# Altium PCB Mega2560PCB2.PcbDoc (part 2 of 2)
Units mil, origin at the board's own origin, x right, y up, seen from the top; angles counter-clockwise.
Board outline 3543.31 x 2165.35 mil, 4 copper layers (Top Layer, GND02, PWR03, Bottom Layer), stack 23.756 mil thick; 55 components, 99 nets, 321 pads, 155 vias.
Unrouted connection lines stored in the file: 47.
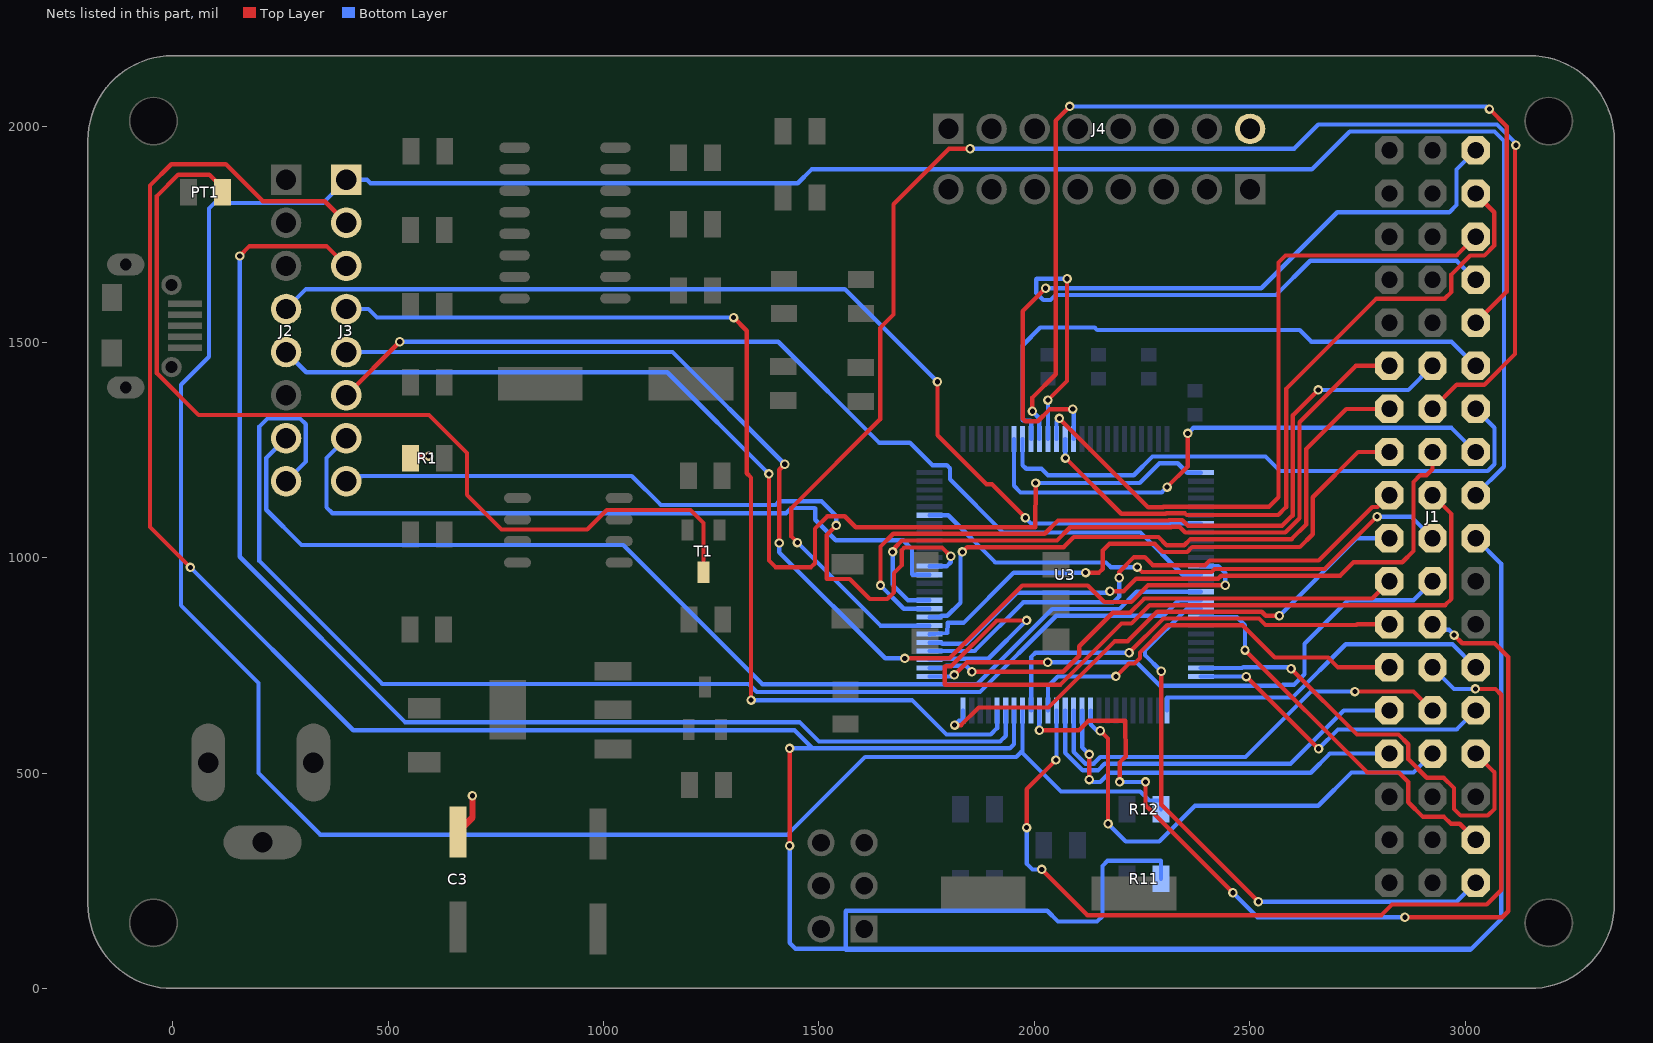
[diagram p4: the nets of this part, all layers, seen from the top]

## Via types
v1: diameter 22, hole 12, Top Layer to Bottom Layer, tented both sides, 155 vias

## Nets (pads, with @x,y where several pads share a name; then routed paths per layer and width w, separated by ;. In a path a pad name is that pad's centre, name@x,y a point inside that pad or via, vN(x,y) a via of type N, cw(c..) or ccw(c..) an arc to the next point about the centre after c; other vN are vias at no path point) (continued)
PB5: J1.51 U3.24 | length 1026.7
  Top Layer w10: v1(2596.15,742.37) 2749.15,589.37 2845.65,589.37 2868.15,566.87 2868.15,532.37 2911.15,489.37 2950.15,489.37 2974.15,465.37 2974.15,416.87 2989.65,401.37 3052.65,401.37 3068.15,416.87 3068.15,501.64 J1.51@3024.41,545.38
  Bottom Layer w10: U3.24@2386.68,743.85 2482.84,743.85 2484.86,745.87 2592.65,745.87 v1(2596.15,742.37)
PB6: J1.50 U3.25 | length 744.1
  Top Layer w10: v1(2492.15,724.16) v1(2659.94,556.37)
  Bottom Layer w10: U3.25@2386.68,724.16 v1(2492.15,724.16) ; v1(2659.94,556.37) 2704.94,601.37 2980.4,601.37 J1.50@3024.41,645.38
PB7: J1.49 U3.26 | length 819.7
  Bottom Layer w10: U3.26@2307.94,645.42 2307.94,675.37 2599.59,675.37 2723.1,798.88 2970.91,798.88 J1.49@3024.41,745.38
PC0: J1.18 U3.53 | length 2057.4
  Top Layer w10: v1(1982.15,854.37) 1913.15,854.37 1807.15,748.37 1793.15,748.37 1792.15,747.37 1792.15,706.37 1793.15,705.37 2060.65,705.37 2202.32,847.04 2225.4,847.04 2268.24,889.87 2953.65,889.87 2968.15,904.37 2968.15,1101.64 J1.18@2924.41,1145.38
  Bottom Layer w10: U3.53@1756.72,763.53 1782.15,763.53 1782.15,765.37 1893.15,765.37 v1(1982.15,854.37)
PC1: J1.17 U3.54 | length 1266.8
  Top Layer w10: v1(2197.21,953.43) 2197.21,966.93 2231.65,1001.37 2256.34,1001.37 2275.33,982.38 2396.18,982.38 2407.42,993.62 2660.24,993.62 2784.45,1117.83 2796.86,1117.83 J1.17@2824.41,1145.38
  Bottom Layer w10: U3.54@1756.72,783.22 1861.5,783.22 1974.65,896.37 2183.59,896.37 2197.21,910 v1(2197.21,953.43)
PC2: J1.16 U3.55 | length 1470.5
  Top Layer w10: v1(2175.71,921.93) 2207.33,921.93 2236.78,951.38 2427.18,951.38 2434,958.2 2709.98,958.2 2741.15,989.37 2854.15,989.37 2880.15,1015.37 2880.15,1175.87 2895.65,1191.37 2910.41,1191.37 2924.41,1205.37 J1.16@2924.41,1245.38
  Bottom Layer w10: U3.55@1756.72,802.9 1784.15,802.9 1786.68,800.37 1841.15,800.37 1959.15,918.37 2172.15,918.37 v1(2175.71,921.93)
PC3: J1.15 U3.56 | length 1345.4
  Top Layer w10: v1(2119.15,965.37) 2150.41,965.37 2158.73,973.69 2158.73,1016.63 2174.47,1032.37 2279.39,1032.37 2298.38,1013.38 2355.19,1013.38 2366.43,1024.62 2616.44,1024.62 2646.3,1054.48 2646.3,1070.18 2646.6,1070.48 2646.6,1140.3 2751.68,1245.38 J1.15@2824.41,1245.38
  Bottom Layer w10: U3.56@1756.72,822.59 1798.15,825.37 1799.15,848.64 1835.71,848.64 1952.44,965.37 v1(2119.15,965.37)
PC4: J1.14 U3.57 | length 3549.4
  Top Layer w10: v1(1450.3,1035) 1436.15,1049.15 1436.15,1115.37 1642.15,1321.37 1642.15,1533.37 1673.15,1564.37 1673.15,1820.37 1802.15,1949.37 v1(1851.15,1949.37) ; J1.14@2924.41,1345.38 2980.4,1401.37 3044.75,1401.37 3116,1472.62 3116,1955.32 v1(3118.1,1957.42)
  Bottom Layer w10: v1(1450.3,1035) 1643.03,842.27 U3.57@1756.72,842.27 ; v1(1851.15,1949.37) 2603.15,1949.37 2659.15,2005.37 3074.07,2005.37 3116,1963.44 3116,1959.52 v1(3118.1,1957.42)
PC5: J1.13 U3.58 | length 1452.8
  Top Layer w10: v1(1833.15,1013.37) 1844.15,1024.37 2068.15,1024.37 2091.65,1047.87 2288.18,1047.87 2307.17,1028.88 2348.19,1028.88 2362.43,1043.12 2597.32,1043.12 2631.1,1076.9 2631.1,1252.4 2724.08,1345.38 J1.13@2824.41,1345.38
  Bottom Layer w10: U3.58@1756.72,861.96 1781.15,861.96 1784.33,865.14 1798.15,865.14 1828.61,895.6 1828.61,1008.83 v1(1833.15,1013.37)
PC6: J1.12 U3.59 | length 1828.6
  Top Layer w10: v1(1643,935.5) 1643,1025.9 1672.47,1055.37 2024.15,1055.37 2055.08,1086.3 2311.77,1086.3 2312.85,1087.38 2343.51,1087.38 2356.77,1074.12 2575,1074.12 2598.38,1097.5 2599.48,1097.5 2600.1,1098.12 2600.1,1330.32 v1(2659.15,1389.37)
  Bottom Layer w10: v1(1643,935.5) 1696.86,881.64 U3.59@1756.72,881.64 ; v1(2659.15,1389.37) 2868.4,1389.37 J1.12@2924.41,1445.38
PC7: J1.11 U3.60 | length 1653.2
  Top Layer w10: v1(1671.1,1013.32) 1671.1,1016.57 1677.1,1022.57 1677.1,1024.27 1692.7,1039.87 2052.65,1039.87 2083.58,1070.8 2318.19,1070.8 2319.27,1071.88 2337.09,1071.88 2350.34,1058.62 2582.52,1058.62 2615.6,1091.7 2615.6,1314.52 2746.46,1445.38 J1.11@2824.41,1445.38
  Bottom Layer w10: v1(1671.1,1013.32) 1671.1,937.29 1707.06,901.33 U3.60@1756.72,901.33
PD7: J1.19 U3.50 | length 1244.3
  Top Layer w10: v1(1815.15,611.37) 1830.15,611.37 1871.15,652.37 2033.07,652.37 2187.07,806.37 2217.15,806.37 2285.15,874.37 2528.15,874.37 2537.15,865.37 v1(2569.15,865.37)
  Bottom Layer w10: v1(1815.15,611.37) 1825.15,621.37 1834.72,621.37 U3.50@1834.72,645.42 ; v1(2569.15,865.37) 2749.16,1045.38 J1.19@2824.41,1045.38
PE5: J2.4 U3.7 | length 2440.6
  Top Layer w10: v1(1775.15,1408.37) 1775.15,1284.38 1889.15,1170.38 1901.64,1170.38 v1(1979.4,1092.62)
  Bottom Layer w10: J2.4@263.15,1577.27 309.25,1623.37 1560.15,1623.37 v1(1775.15,1408.37) ; v1(1979.4,1092.62) 1992.64,1079.38 U3.7@2386.68,1079.38
PG0: J1.22 U3.51 | length 1346.1
  Top Layer w10: v1(1814.36,727.87) 1843.86,757.37 v1(2031.15,757.37)
  Bottom Layer w10: U3.51@1756.72,724.16 1810.65,724.16 v1(1814.36,727.87) ; v1(2031.15,757.37) 2237.15,757.37 2291.86,702.66 2575.21,702.66 2577.42,704.87 2602.65,704.87 2627.15,729.37 2627.15,800.2 2728.32,901.37 2880.4,901.37 J1.22@2924.41,945.38
PG1: J1.21 U3.52 | length 1175.6
  Top Layer w10: v1(1855.15,735.37) 2067.15,735.37 2104.3,772.52 2104.3,794.37 2182.31,872.37 2222.53,872.37 2255.53,905.37 2784.4,905.37 J1.21@2824.41,945.38
  Bottom Layer w10: U3.52@1756.72,743.85 1790.63,743.85 1796.15,749.37 1841.15,749.37 v1(1855.15,735.37)
PG2: J1.20 U3.70 | length 1296.1
  Top Layer w10: v1(2238.9,978.12) 2250.14,966.88 2411.68,966.88 2418.5,973.7 2673.98,973.7 v1(2795.65,1095.37)
  Bottom Layer w10: U3.70@1756.72,1098.38 1800.15,1098.38 1909.66,988.87 2166.65,988.87 2177.4,978.12 v1(2238.9,978.12) ; v1(2795.65,1095.37) 2874.42,1095.37 J1.20@2924.41,1045.38
PG5: J2.5 U3.1 | length 2684.3
  Top Layer w10: v1(1384.15,1194.37) 1384.15,993.45 1399.5,978.1 1481.8,978.1 1490.8,987.1 1490.8,1067.45 1519.72,1096.37 1560.15,1096.37 1585.65,1070.87 2002.15,1070.87 v1(2003.15,1173.37)
  Bottom Layer w10: J2.5@263.15,1477.27 310.05,1430.37 1148.15,1430.37 v1(1384.15,1194.37) ; v1(2003.15,1173.37) 2244.64,1173.37 2290.64,1219.37 2333.16,1219.37 2355.15,1197.38 U3.1@2386.68,1197.38
PH3: J2.7 U3.15 | length 2611.1
  Bottom Layer w10: J2.7@263.15,1277.27 217.15,1231.27 217.15,1111.4 299.18,1029.37 1045.84,1029.37 1368.84,706.37 1867.15,706.37 2041.65,880.87 2197.51,880.87 2237.65,921.01 U3.15@2386.68,921.01
PH4: J2.8 U3.16 | length 2984.8
  Bottom Layer w10: J2.8@263.15,1177.27 309.15,1223.27 309.15,1309.87 295.65,1323.37 220.15,1323.37 201.15,1304.37 201.15,992.37 486.69,706.83 1337.38,706.83 1355.84,688.37 1874.15,688.37 2051.15,865.37 2299.59,865.37 2335.54,901.33 U3.16@2386.68,901.33
PH5: J1.54 U3.17 | length 1384.2
  Top Layer w10: v1(2294.65,736.4) 2294.65,426.87 v1(2520.15,201.37)
  Bottom Layer w10: v1(2294.65,736.4) 2257.15,773.9 2257.15,784.37 2354.42,881.64 U3.17@2386.68,881.64 ; v1(2520.15,201.37) 2980.4,201.37 J1.54@3024.41,245.38
PH6: J1.53 U3.18 | length 913.3
  Top Layer w10: v1(2489.15,785.37) 2773.15,501.37 2846.15,501.37 2868.15,479.37 2868.15,432.37 2902.15,398.37 2951.15,398.37 2967.15,382.37 2987.42,382.37 J1.53@3024.41,345.38
  Bottom Layer w10: U3.18@2386.68,861.96 2470.65,861.96 2489.15,843.46 v1(2489.15,785.37)
PK0: J1.37 U3.89 | length 1704.1
  Top Layer w10: v1(2026.15,1625.37) 1973.15,1572.37 1973.15,1322.87 1979.15,1316.87 2008.15,1316.87 2036.15,1344.87 v1(2089.15,1344.87)
  Bottom Layer w10: v1(2026.15,1625.37) 2526.67,1625.37 2703.18,1801.88 2963.47,1801.88 2980.15,1818.56 2980.15,1901.12 J1.37@3024.41,1945.38 ; v1(2089.15,1344.87) 2091.41,1342.61 U3.89@2091.41,1275.38
PK1: J1.38 U3.88 | length 1678.1
  Top Layer w10: v1(2072.15,1231.37) 2201.72,1101.8 2305.35,1101.8 2306.43,1102.88 2349.93,1102.88 2353.71,1099.1 2566.36,1099.1 2584.6,1117.34 2584.6,1391.82 2794.15,1601.37 2952.65,1601.37 2968.15,1616.87 2968.15,1657.37 3012.15,1701.37 3044.75,1701.37 3067.91,1724.53 3067.91,1801.88 J1.38@3024.41,1845.38
  Bottom Layer w10: U3.88@2071.72,1275.38 2071.72,1231.8 v1(2072.15,1231.37)
PK2: J1.39 U3.87 | length 1681.5
  Top Layer w10: v1(2058.15,1323.37) 2264.22,1117.3 2298.93,1117.3 2300.01,1118.38 2544.78,1118.38 2566.9,1140.5 2566.9,1685.12 2583.15,1701.37 2980.4,1701.37 J1.39@3024.41,1745.38
  Bottom Layer w10: U3.87@2051.72,1275.38 2051.72,1316.94 v1(2058.15,1323.37)
PK3: J1.40 U3.86 | length 1576.6
  Top Layer w10: v1(2031.72,1365.94) 2076.15,1410.37 v1(2076.15,1647.37)
  Bottom Layer w10: U3.86@2031.72,1275.38 v1(2031.72,1365.94) ; v1(2076.15,1647.37) 2005.65,1647.37 2004.65,1646.37 2004.65,1614.37 2020.65,1598.37 2037.65,1598.37 2049.15,1609.87 2561.15,1609.87 2640.65,1689.37 2980.42,1689.37 J1.40@3024.41,1645.38
PK4: J1.41 U3.85 | length 2333.6
  Top Layer w10: v1(1995.62,1339.94) 1995.62,1371.77 2049.6,1425.75 2049.6,2014.5 v1(2082.5,2047.4) ; J1.41@3024.41,1545.38 3096.6,1617.57 3096.6,2001.1 v1(3056.38,2041.32)
  Bottom Layer w10: v1(1995.62,1339.94) 2011.72,1323.84 U3.85@2011.72,1275.38 ; v1(2082.5,2047.4) 3050.3,2047.4 v1(3056.38,2041.32)
PK5: J1.42 U3.84 | length 1341.4
  Bottom Layer w10: U3.84@1992.72,1275.38 1992.72,1317.37 1991.72,1318.37 1974.15,1318.37 1973.15,1319.37 1973.15,1493.37 2013.98,1534.2 2140.08,1534.2 2145.91,1528.37 2616.15,1528.37 2643.15,1501.37 2968.42,1501.37 J1.42@3024.41,1445.38
PK6: J1.43 U3.83 | length 1350.7
  Bottom Layer w10: U3.83@1972.72,1275.38 1972.72,1214.8 1981.15,1206.37 2016.75,1206.37 2031.75,1191.37 2231.07,1191.37 2274.57,1234.87 2536.65,1234.87 2570.15,1201.37 3052.65,1201.37 3068.15,1216.87 3068.15,1301.64 J1.43@3024.41,1345.38
PK7: J1.44 U3.82 | length 1316.8
  Top Layer w10: v1(2308.15,1163.87) 2356.15,1211.87 v1(2356.15,1288.37)
  Bottom Layer w10: U3.82@1952.72,1275.38 1952.72,1166.87 1968.22,1151.37 2295.65,1151.37 v1(2308.15,1163.87) ; v1(2356.15,1288.37) 2369.15,1301.37 2968.42,1301.37 J1.44@3024.41,1245.38
PL0: J1.30 U3.35 | length 1138.9
  Top Layer w10: v1(2153.15,598.37) 2171.15,580.37 v1(2171.15,382.37)
  Bottom Layer w10: U3.35@2130.78,645.42 2130.78,613.24 2145.65,598.37 v1(2153.15,598.37) ; v1(2171.15,382.37) 2212.15,341.37 2290.15,341.37 2373.15,424.37 2659.15,424.37 2736.15,501.37 2880.4,501.37 J1.30@2924.41,545.38
PL1: J1.29 U3.36 | length 894.1
  Top Layer w10: v1(2127.6,484.8) v1(2127.65,543.37) v1(2127.65,543.37)
  Bottom Layer w10: U3.36@2111.09,645.42 2111.09,559.93 v1(2127.65,543.37) ; v1(2127.6,484.8) 2130.72,484.8 2136.38,479.14 2153.14,479.14 2174.87,500.87 2641.65,500.87 2686.16,545.38 J1.29@2824.41,545.38
PL2: J1.28 U3.37 | length 1028.1
  Top Layer w10: v1(2744.15,689.37) 2880.42,689.37 J1.28@2924.41,645.38
  Bottom Layer w10: U3.37@2091.41,645.42 2091.41,549.21 2118.74,521.87 2137.78,521.87 2153.26,537.35 2490.2,537.35 2642.22,689.37 v1(2744.15,689.37)
PL3: J1.27 U3.38 | length 925.5
  Bottom Layer w10: U3.38@2071.72,645.42 2071.72,546.97 2112.32,506.37 2147.76,506.37 2163.24,521.85 2594.63,521.85 2718.16,645.38 J1.27@2824.41,645.38
PL4: J1.26 U3.39 | length 2199.1
  Top Layer w10: v1(1982.15,373.37) 1982.15,462.37 v1(2050.15,530.37) ; v1(2017.15,276.37) 2123.15,170.37 2805.85,170.37 2830.35,194.87 3050.15,194.87 3084.15,228.87 3084.15,681.87 3070.65,695.37 v1(3024.15,695.37)
  Bottom Layer w10: v1(1982.15,373.37) 1982.15,289.87 1995.65,276.37 v1(2017.15,276.37) ; v1(2050.15,530.37) 2051.72,531.94 U3.39@2051.72,645.42 ; J1.26@2924.41,745.38 2974.42,695.37 v1(3024.15,695.37)
PL5: J1.25 U3.40 | length 955.9
  Top Layer w10: v1(2189.55,724.37) 2219.53,754.34 2232.65,754.34 2245.18,766.87 2245.18,779.99 2308.55,843.37 2483.15,843.37 2558.15,768.37 2682.15,768.37 2705.14,745.38 J1.25@2824.41,745.38
  Bottom Layer w10: U3.40@2031.72,645.42 2031.72,701.72 2054.37,724.37 v1(2189.55,724.37)
PL6: J1.24 U3.41 | length 2269.4
  Top Layer w10: v1(2011.72,599.37) 2103.51,599.37 2125.51,621.37 2211.15,621.37 2212.15,538.37 2198.15,524.37 v1(2198.15,479.37) ; v1(2258.15,479.37) 2258.15,425.37 v1(2461.15,222.37) ; v1(2860.15,165.37) 3086.15,165.37 3100.15,179.37 3100.15,769.32 3068.1,801.37 2993.42,801.37 v1(2974.41,820.38)
  Bottom Layer w10: v1(2011.72,599.37) U3.41@2011.72,645.42 ; v1(2198.15,479.37) v1(2258.15,479.37) ; v1(2461.15,222.37) 2518.15,165.37 v1(2860.15,165.37) ; J1.24@2924.41,845.38 2936.98,832.81 2962.55,832.81 2974.41,820.95 v1(2974.41,820.38)
PL7: J1.23 U3.42 | length 999.7
  Top Layer w10: v1(2220.15,779.37) 2299.65,858.87 2521.65,858.87 2536.65,843.87 2748.1,843.87 2749.61,845.38 J1.23@2824.41,845.38
  Bottom Layer w10: U3.42@1992.72,645.42 1992.72,769.55 2002.54,779.37 v1(2220.15,779.37)
RXD1: J3.3 U3.45 | length 2994.6
  Top Layer w10: v1(155.5,1700.3) 178.4,1723.2 357.22,1723.2 J3.3@403.15,1677.27
  Bottom Layer w10: v1(155.5,1700.3) 155.5,1002.02 539.15,618.37 1455.21,618.37 1500.21,573.37 1920.65,573.37 1933.72,586.44 U3.45@1933.72,645.42
RXD2: J3.5 U3.12 | length 2665.6
  Top Layer w10: v1(1408,1034.1) 1408,1204.3 v1(1420.61,1216.91) ; v1(1699.15,766.37) 1803.23,766.37 1972.23,935.37 2124.15,935.37 2162.4,897.12 2225.36,897.12 2264.12,935.88 v1(2443.15,935.88)
  Bottom Layer w10: J3.5@403.15,1477.27 1160.25,1477.27 v1(1420.61,1216.91) ; v1(1408,1034.1) 1408,1012.4 1654.03,766.37 v1(1699.15,766.37) ; U3.12@2386.68,980.38 2427.15,980.38 2443.15,964.38 v1(2443.15,935.88)
RXD3: J3.7 U3.63 | length 1703.5
  Bottom Layer w10: J3.7@403.15,1277.27 357.22,1231.34 357.22,1116.8 370.65,1103.37 1423.65,1103.37 1435.65,1115.37 1490.65,1115.37 1491.65,1114.37 1491.65,1087.87 1539.15,1040.37 1695.65,1040.37 1716.15,1019.87 1716.15,961.38 1717.15,960.38 U3.63@1756.72,960.38
SCL: J1.45 J3.1 R12.1 U3.43 | length 7756.6
  Bottom Layer w10: U3.43@1972.72,645.42 1972.72,552.08 ; R12.1@2294.24,415.8 2294.24,436.37 2267.15,436.37 2246.15,457.37 2062.15,457.37 1972.72,546.8 1972.72,552.08 ; J1.45@3024.41,1145.38 3090.15,1211.12 3090.15,1967.37 3068.15,1989.37 2732.15,1989.37 2644.15,1901.37 1483.15,1901.37 1451.15,1869.37 459.15,1869.37 451.25,1877.27 J3.1@403.15,1877.27 349.25,1823.37 97.15,1823.37 84.15,1810.37 84.15,1466.37 19.15,1401.37 19.15,889.37 199.3,709.22 199.3,500.22 342.32,357.2 1426.98,357.2 1607.29,537.51 1958.15,537.51 1970.08,549.44 1972.72,552.08
SDA: J1.46 J3.2 R11.1 U3.44 | length 9176.7
  Top Layer w10: v1(41.15,977.37) -52.85,1071.37 -52.85,1863.75 -3.4,1913.2 123.5,1913.2 209.33,1827.37 353.05,1827.37 J3.2@403.15,1777.27 ; v1(1432.15,331.37) v1(1432.15,557.37)
  Bottom Layer w10: v1(41.15,977.37) 419.06,599.46 1443.46,599.46 1485.55,557.37 ; v1(1432.15,331.37) 1432.15,105.87 1445.65,92.37 1562.15,92.37 ; v1(1432.15,557.37) 1485.55,557.37 ; U3.44@1952.72,645.42 1952.72,566.94 1943.15,557.37 1485.55,557.37 ; R11.1@2294.24,254.8 2294.24,295.37 2293.24,296.37 2170.15,296.37 2158.15,284.37 2158.15,167.87 2145.65,155.37 2055.15,155.37 2030.12,180.4 1563.15,180.4 1562.15,179.4 1562.15,92.37 ; 3011.9,92.37 1562.15,92.37 ; J1.46@3024.41,1045.38 3084.15,985.64 3084.15,161.62 3011.9,89.37 1563.15,89.37 1562.15,90.37 1562.15,92.37
TXD1: J3.4 U3.46 | length 2463.5
  Top Layer w10: v1(1302.15,1557.37) 1332.63,1526.89 1332.63,1195.84 1342.58,1185.89 v1(1342.58,669.37)
  Bottom Layer w10: J3.4@403.15,1577.27 454.25,1577.27 474.15,1557.37 v1(1302.15,1557.37) ; v1(1342.58,669.37) 1716.15,669.37 1796.15,589.37 1898.72,589.37 1913.72,604.37 U3.46@1913.72,645.42
TXD2: J3.6 U3.13 | length 2274
  Top Layer w10: J3.6@403.15,1377.27 v1(527.25,1501.37)
  Bottom Layer w10: v1(527.25,1501.37) 1405.56,1501.37 1639.79,1267.14 1710.88,1267.14 1763.65,1214.37 1797.15,1214.37 1804.15,1207.37 1804.15,1181.88 1927.66,1058.37 2246.65,1058.37 2344.64,960.38 U3.13@2386.68,960.38
TXD3: J3.8 U3.64 | length 1821.7
  Top Layer w10: v1(1540.15,1074.87) 1518.15,1052.87 1518.15,951.37 1519.15,950.37 1571.73,950.37 1617.9,904.2 1658.9,904.2 1674.07,919.37 1674.07,934.32 1674.15,934.39 1674.15,964.25 1692.6,982.7 1692.6,1017.85 1698.46,1023.71 1785.81,1023.71 v1(1806.15,1003.37)
  Bottom Layer w10: J3.8@403.15,1177.27 414.8,1188.92 438.63,1188.92 439.44,1189.73 1065.79,1189.73 1133.15,1122.37 1399.65,1122.37 1408.15,1130.87 1506.15,1130.87 1540.15,1096.87 v1(1540.15,1074.87) ; U3.64@1756.72,980.38 1797.15,980.38 1806.15,989.38 v1(1806.15,1003.37)
VBUS: PT1.2 T1.3 | length 2229
  Top Layer w10: PT1.2@115.37,1848 115.37,1858.83 85.19,1889.01 12.6,1889.01 -36.72,1839.7 -36.72,1428.28 60.22,1331.34 594.75,1331.34 683.08,1243.01 683.08,1145.77 763.25,1065.59 962.41,1065.59 1007.62,1110.81 1201.92,1110.81 1232.3,1080.44 T1.3@1232.3,966.2
VIN: C3.1 J4.8 R1.2 | length 142.8
  Top Layer w15: R1.2@551.63,1230.67 556.76,1235.8 v1(594.1,1235.8) ; C3.1@662.05,363.32 695.9,397.17 v1(695.9,447.5)
pads on no net: "Micro USB1.0" "Micro USB1.4" AMS-5.0V.4 J4.1 KEY1.5 S1.1 S2.1 S3.1 S4.1 U2.9 U2.10 U2.11 U2.12 U2.14 U2.15 U3.4 U3.8 U3.9 U3.10 U3.14 U3.27 U3.28 U3.29 U3.31 U3.47 U3.48 U3.49 U3.61 U3.65 U3.66 U3.67 U3.68 U3.69 U3.79 U3.80

## Polygon pours and split planes (outlines as drawn)
GND on Top Layer "GND_L01_P001" (solid, pour order 1): -97.3,2087.5 -158.3,2026.5 -158.3,150.8 -63.7,56.2 3224.1,56.2 3303.4,135.5 3294.2,144.7 3294.2,2014.3 3190.5,2118 -63.7,2118 -97.3,2084.4
GND on Bottom Layer "GND_L04_P002" (solid, pour order 2): -97.3,2087.5 -158.3,2026.5 -158.3,150.8 -149.1,150.8 -45.4,47.1 -36.3,56.2 3224.1,56.2 3300.3,132.4 3300.3,2023.4 3193.5,2130.2 -66.8,2130.2 -66.8,2124.1 -91.2,2099.7
GND on GND02 (split plane): 3161.17,2144.97 3172.69,2143.84 3184.11,2141.95 3195.38,2139.32 3206.45,2135.96 3217.28,2131.89 3227.82,2127.11 3238.03,2121.66 3247.86,2115.55 3257.26,2108.8 3266.21,2101.46 3274.65,2093.55 3282.57,2085.11 3289.91,2076.16 3296.65,2066.75 3302.76,2056.93 3308.21,2046.72 3312.99,2036.18 3317.07,2025.35 3320.43,2014.28 3323.05,2003 3324.94,1991.59 3326.07,1980.07 3326.43,1969.2 3326.36,1968.5 3326.36,196.85 3326.43,196.15 3326.07,185.28 3324.94,173.77 3323.05,162.35 3320.43,151.08 3317.07,140.01 3312.99,129.18 3308.21,118.63 3302.76,108.43 3296.65,98.6 3289.91,89.19 3282.57,80.25 3274.65,71.8 3266.21,63.89 3257.26,56.55 3247.86,49.81 3238.03,43.7 3227.82,38.24 3217.28,33.47 3206.45,29.39 3195.38,26.03 3184.11,23.4 3172.69,21.52 3161.17,20.38 3150.3,20.03 3149.61,20.1 3149.6,20.1 0,20.1 -0.7,20.03 -11.57,20.38 -23.08,21.52 -34.5,23.4 -45.77,26.03 -56.85,29.39 -67.68,33.47 -78.22,38.24 -88.42,43.7 -98.25,49.81 -107.66,56.55 -116.6,63.89 -125.05,71.8 -132.96,80.25 -140.3,89.19 -147.04,98.6 -153.15,108.43 -158.61,118.63 -163.38,129.17 -167.46,140.01 -170.82,151.08 -173.45,162.35 -175.33,173.77 -176.47,185.28 -176.82,196.15 -176.75,196.85 -176.75,1968.5 -176.82,1969.2 -176.47,1980.07 -175.33,1991.59 -173.45,2003 -170.82,2014.27 -167.46,2025.35 -163.38,2036.18 -158.61,2046.72 -153.15,2056.93 -147.04,2066.75 -140.3,2076.16 -132.96,2085.11 -125.05,2093.55 -116.6,2101.46 -107.66,2108.8 -98.25,2115.55 -88.42,2121.66 -78.22,2127.11 -67.68,2131.89 -56.85,2135.96 -45.77,2139.32 -34.5,2141.95 -23.08,2143.84 -11.57,2144.97 -0.7,2145.33 0,2145.26 3149.61,2145.26 3150.3,2145.33
VIN on PWR03 (split plane): 736,1236.29 736,334.01 690.99,289 641.71,289 616.7,314.01 616.7,427.49 679.3,490.1 680.41,491.75 680.8,493.7 680.8,1123.3 680.41,1125.25 679.3,1126.9 648.5,1157.7 646.85,1158.81 644.9,1159.2 528.11,1159.2 500.4,1186.91 500.4,1272.69 526.41,1298.7 673.59,1298.7
+5V on PWR03 (split plane): 3161.17,2144.97 3172.69,2143.84 3184.11,2141.95 3195.38,2139.32 3206.45,2135.96 3217.28,2131.89 3227.82,2127.11 3238.03,2121.66 3247.86,2115.55 3257.26,2108.8 3266.21,2101.46 3274.65,2093.55 3282.57,2085.11 3289.91,2076.16 3296.65,2066.75 3302.76,2056.93 3308.21,2046.72 3312.99,2036.18 3317.07,2025.35 3320.43,2014.28 3323.05,2003 3324.94,1991.59 3326.07,1980.07 3326.43,1969.19 3326.36,1968.5 3326.36,196.86 3326.36,196.85 3326.43,196.16 3326.07,185.28 3324.94,173.77 3323.05,162.35 3320.43,151.08 3317.07,140.01 3312.99,129.18 3308.21,118.63 3302.76,108.43 3296.65,98.6 3289.91,89.19 3282.57,80.25 3274.65,71.8 3266.21,63.89 3257.26,56.55 3247.86,49.81 3238.03,43.7 3227.82,38.24 3217.28,33.47 3206.45,29.39 3195.38,26.03 3184.11,23.4 3172.69,21.52 3161.17,20.38 3150.3,20.03 3149.61,20.1 3149.6,20.1 0,20.1 -0.7,20.03 -11.57,20.38 -23.08,21.52 -34.5,23.4 -45.77,26.03 -56.85,29.39 -67.68,33.47 -78.22,38.24 -88.42,43.7 -98.25,49.81 -107.66,56.55 -116.6,63.89 -125.05,71.8 -132.96,80.25 -140.3,89.19 -147.04,98.6 -153.15,108.43 -158.61,118.63 -163.38,129.17 -167.46,140.01 -170.82,151.08 -173.45,162.35 -175.33,173.77 -176.47,185.28 -176.82,196.15 -176.75,196.85 -176.75,1968.5 -176.82,1969.2 -176.47,1980.07 -175.33,1991.59 -173.45,2003 -170.82,2014.27 -167.46,2025.35 -163.38,2036.18 -158.61,2046.72 -153.15,2056.93 -147.04,2066.75 -140.3,2076.16 -132.96,2085.11 -125.05,2093.55 -116.6,2101.46 -107.66,2108.8 -98.25,2115.55 -88.42,2121.66 -78.22,2127.11 -67.68,2131.89 -56.85,2135.96 -45.77,2139.32 -34.5,2141.95 -23.08,2143.84 -11.57,2144.97 -0.7,2145.33 0,2145.26 3149.61,2145.26 3150.31,2145.33

## Keep-outs
Keep-Out Layer:
  the board outline again, w10

## Other copper
PWR03 (plane layer: these items are gaps in the copper):
  lines w10: 495.3,1184.8 526,1154.1 644.9,1154.1 675.7,1123.3 675.7,493.7 611.6,429.6 611.6,311.9 639.6,283.9 693.1,283.9 741.1,331.9 741.1,1238.4 675.7,1303.8 524.3,1303.8 495.3,1274.8 495.3,1184.8

## Silkscreen, mask and mechanical layers (free items; w line width, h text height)
Top Overlay:
  lines w10: -6.3,226.26 ccw(c-44.85,152.37) 38.49,152.7 ; 38.49,155.14 238.96,155.14
  text "5V" at 1862.1,2088.9 h45
  text "3V3" at 2038.68,2089.8 h45
  text "5V" at 2161.1,2088.9 h45
  text "VIN" at 2448.92,2087.9 h45
  text "DTR" at 1937.28,2087 h45
  text "GND" at 2268.45,2064.5 h45
  text "Pwr" at 1713.7,1905.3 h85 r90
  text "AI" at 2585.8,1898.5 h90 r270
  text "A1" at 2425.27,1700.7 h80 r90
  text "A6" at 1923.13,1699.51 h80 r90
  text "A5" at 2023.56,1699.4 h80 r90
  text "A4" at 2123.99,1699.01 h80 r90
  text "A3" at 2224.41,1699.79 h80 r90
  text "A2" at 2324.84,1699.65 h80 r90
  text "A0" at 2525.7,1699.01 h80 r90
  text "A7" at 1822.7,1697.79 h80 r90
  text "Ver 2.1" at 2315.1,1481.9 h140
  text "Designer By" at 1723.1,1478.7 h115
  text "Scooo" at 2080.1,1251.4 h135
  text "ATmega2560-16AU" at 1938.7,1091.9 h80
  text "USB" at 10.1,1024.9 h130 r90
  text "DC" at 23.3,866.2 h150
  text "Maker" at 2411.9,865.3 h100
  text "!! Max 18V !!" at -157.42,754.1 h100
  text "7-12V" at 2412,734.2 h100
  text "2021" at 2412,603.4 h100
  text "RST" at 1778.3,589.7 h110
  text "M3 × 4" at 56.6,170.77 h60
  text "ICSP" at 1405.8,136.9 h100 r90
Bottom Overlay:
  lines w10: -6.23,226.39 ccw(c-44.85,152.37) 38.61,154.75 ; 40.5,154.8 238.13,154.73 ; 873.2,1225.3 877.6,684 ; 877,1510.8 877.5,1349.2 ; 1531.5,675 1535.9,1216.3
  text "A8" at 3061.6,2026.9 h75
  text "5V" at 2696.4,1925.46 h80
  text "0(RXD0)" at 175.89,1870.45 h65
  text "21(SCL)" at 724.77,1864.58 h63
  text "22" at 2637.55,1825.96 h75
  text "23" at 2750.9,1826.38 h75
  text "A9" at 3228.08,1825.7 h75
  text "1(TXD0)" at 175.89,1770.19 h65
  text "20(SDA)" at 727.5,1765.67 h63
  text "A10" at 3246.65,1729.5 h75
  text "25" at 2750.9,1726.25 h75
  text "24" at 2637.55,1725.83 h75
  text "19(RXD1)" at 739.87,1666.75 h63
  text "2" at 175.89,1657.68 h65
  text "A11" at 3242.83,1631.3 h75
  text "26" at 2637.55,1625.65 h75
  text "27" at 2750.9,1625.23 h75
  text "Ver 2.1" at 1168.2,1596 h110
  text "Designer By" at 1680.4,1582.2 h100
  text "18(TXD1)" at 737.14,1567.84 h63
  text "3" at 175.89,1558.2 h65
  text "28" at 2637.55,1526.01 h75
  text "29" at 2750.9,1526.01 h75
  text "A12" at 3246.61,1526.5 h75
  text "17(RXD2)" at 739.87,1468.93 h63
  text "Use with expansion board" at 1653.7,1467.6 h75 r90
  text "4" at 175.89,1457.16 h65
  text "30" at 2637.55,1425.88 h75
  text "31" at 2750.9,1425.88 h75
  text "A13" at 3246.86,1426.3 h75
  text "Scooo" at 1433.5,1371.7 h120
  text "16(TXD2)" at 737.14,1370.01 h63
  text "5" at 175.89,1357.69 h65
  text "A14" at 3247.55,1329.3 h75
  text "32" at 2637.55,1325.76 h75
  text "33" at 2750.9,1325.76 h75
  text "15(RXD3)" at 739.87,1271.1 h63
  text "6" at 175.89,1257.43 h65
  text "USB" at 13.8,1255.7 h130 r90
  text "ATmega2560-16AU" at 1499.38,1240.7 h70
  text "A15" at 3247.31,1226.3 h75
  text "34" at 2637.55,1225.64 h75
  text "35" at 2750.9,1225.64 h75
  text "14(TXD3)" at 737.14,1172.18 h63
  text "7" at 175.89,1156.39 h65
  text "36" at 2637.55,1125.51 h75
  text "37" at 2750.9,1125.51 h75
  text "SCL" at 3251.68,1123.1 h75
  text "38" at 2637.55,1025.39 h75
  text "39" at 2750.9,1025.39 h75
  text "SDA" at 3256.26,1024.3 h75
  text "Maker" at 693.9,952.8 h92
  text "40" at 2637.35,930.49 h75
  text "41" at 2750.7,930.06 h75
  text "AREF" at 3276.52,926.2 h75
  text "42" at 2637.35,830.42 h75
  text "43" at 2750.7,830.84 h75
  text "GND" at 3258.03,821.1 h75
  text "7-12V" at 694,792.2 h95
  text "44" at 2637.35,730.3 h75
  text "45" at 2750.7,730.72 h75
  text "DC" at 293.3,727.5 h140
  text "13" at 3220,725.3 h75
  text "This 8-bit board with 54 digital I / O pins (15 of which can be used as PWM outputs), 16 analog inputs and 4 UARTS (hardware serial ports)" at 1473,669.7 h70
  text "2021" at 694.9,631.3 h103
  text "46" at 2637.35,630.08 h75
  text "47" at 2750.7,629.69 h75
  text "12" at 3219.76,625.4 h75
  text "11" at 3215.97,528 h75
  text "48" at 2637.55,524.77 h75
  text "49" at 2750.9,524.77 h75
  text "ICSP" at 1480.2,453.8 h120
  text "10" at 3219.79,430.2 h75
  text "50" at 2637.55,424.65 h75
  text "51" at 2750.9,424.65 h75
  text "9" at 3202.79,331.7 h75
  text "52" at 2637.55,324.53 h75
  text "53" at 2750.9,324.53 h75
  text "GND" at 2725.6,220.66 h80
  text "M3 × 4" at 215.76,170.57 h60
  text "8" at 3033.6,121.86 h63

## Text inside footprints (layer, text, board x,y; h text height)
U3: Mechanical 16 "TQFP 100" at 2182.35,862.74 h49.6; Mechanical 16 "R" at 1937.72,918.25 h37.2